# EAGLE board shield8routedhigh (EAGLE 8.7.1)
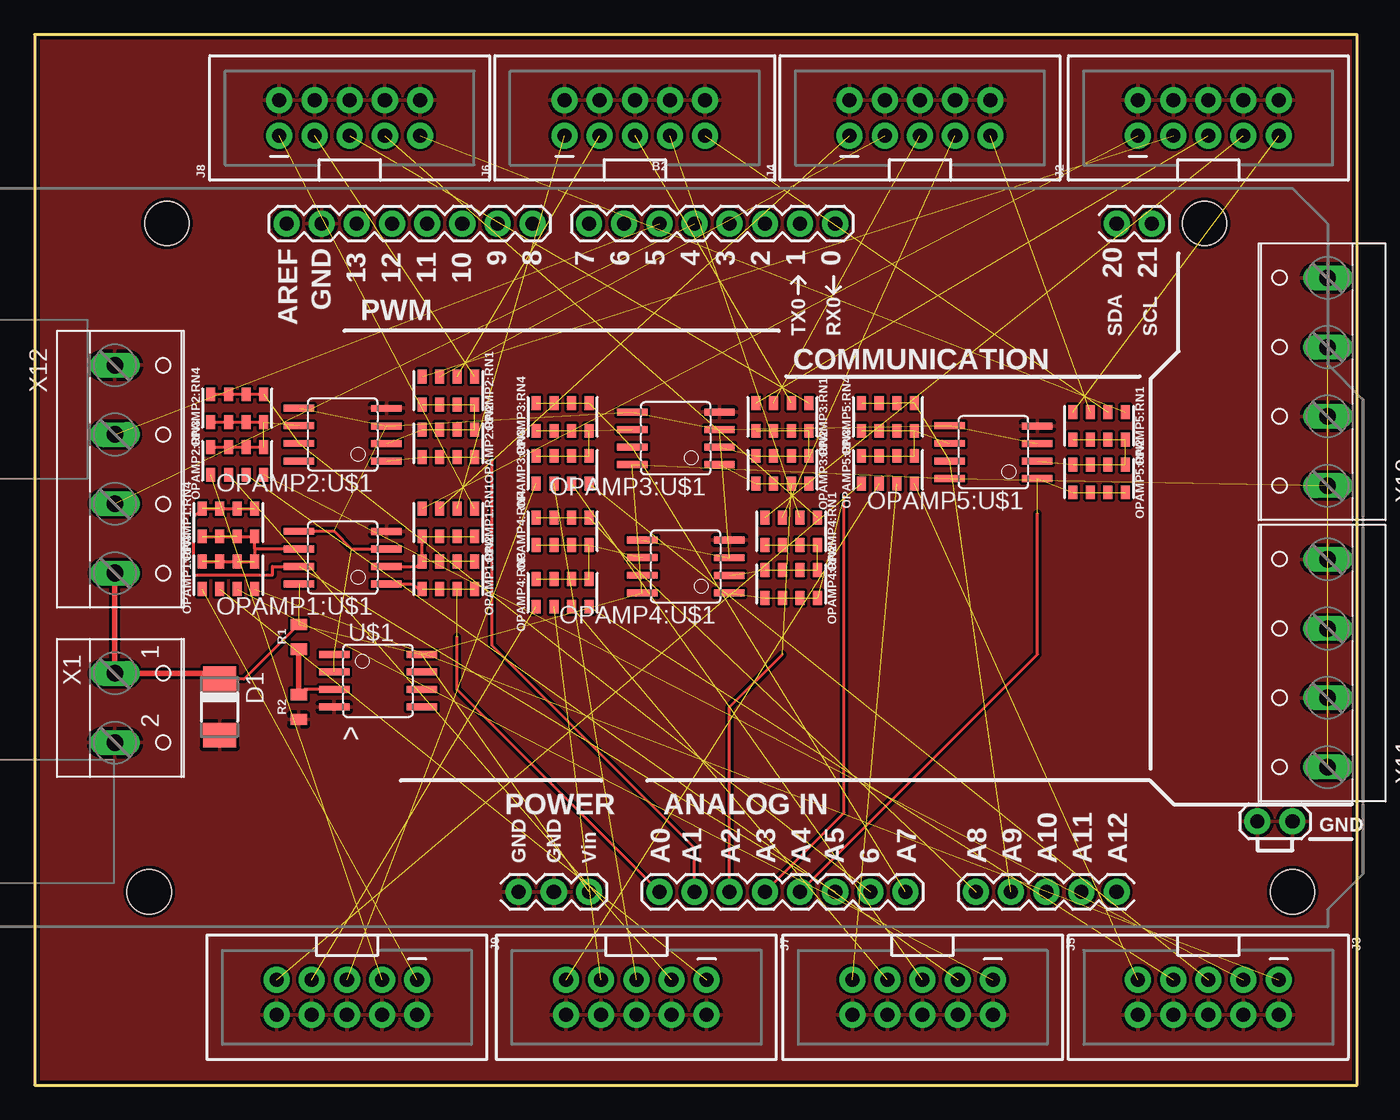
[diagram p0: board, top side]
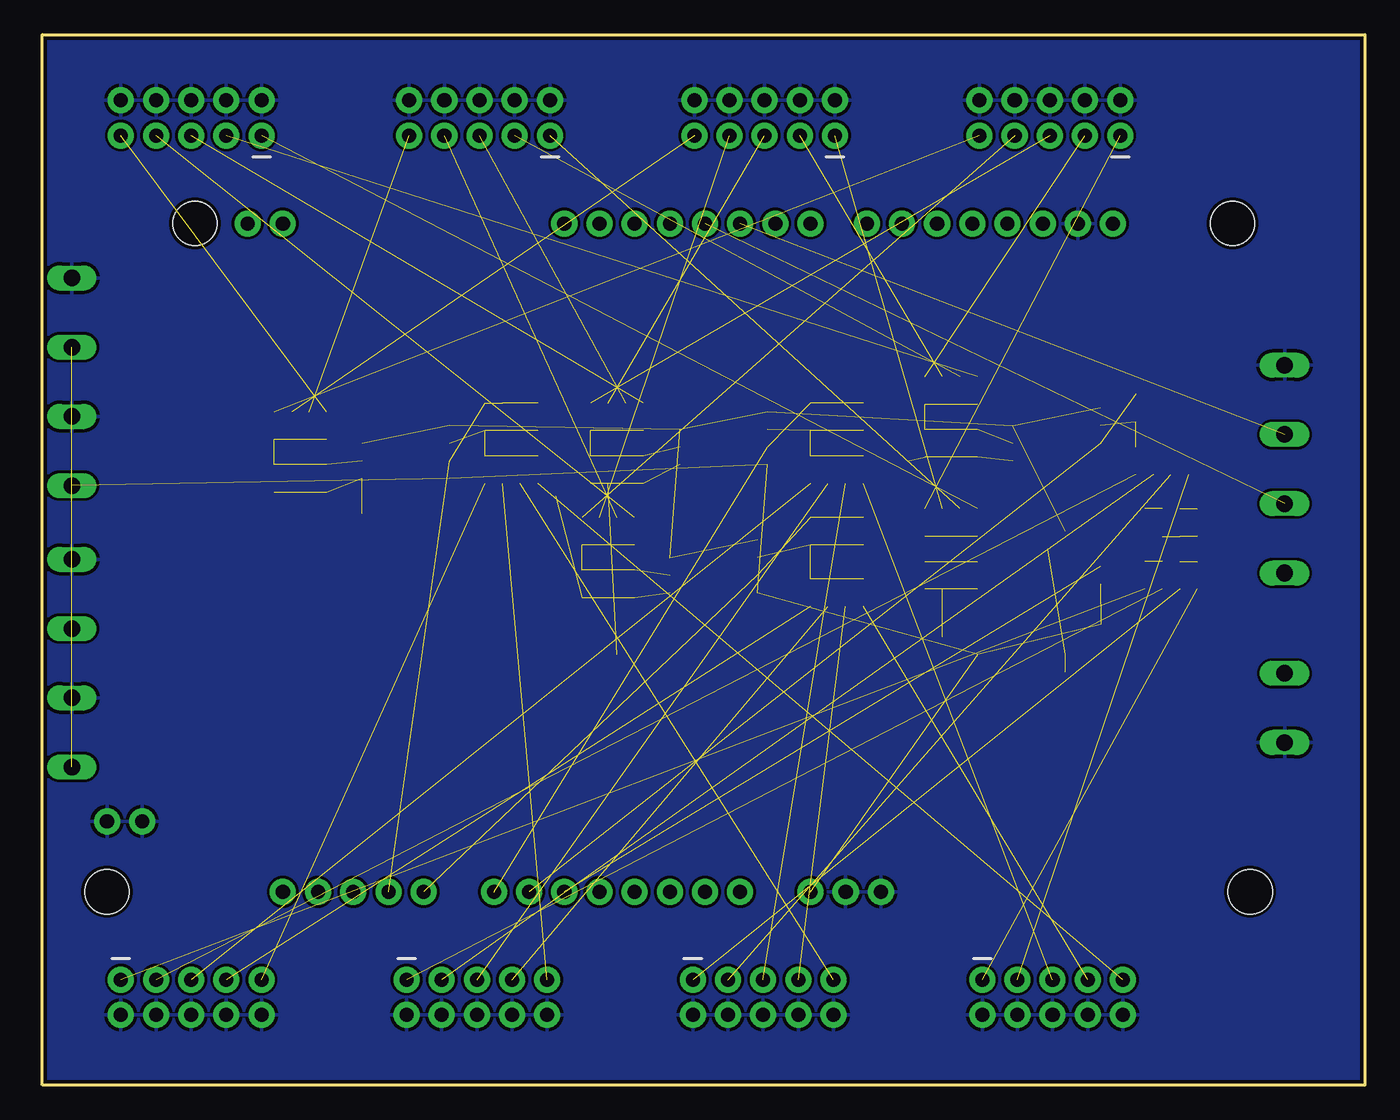
[diagram p1: board, bottom side, seen from below]

Size 95.5 x 75.87 mm. Coordinates in mm from the lower left corner, seen from the top.
Outline: 0,0 95.5,0 95.5,75.87 0,75.87 0,0
Copper layers (1*16): Top 0.035mm / dielectric 1.5mm / Bottom 0.035mm
Design rules "Dirty8TS *": minimum track width 5mil, minimum drill 12mil, track to track 8mil, track to pad 8mil, pad to pad 8mil, via to via 8mil, smd to smd 0mil, copper to edge 10mil, drill to drill 10mil, minimum pad ring 10mil, minimum via ring 6mil, stop-mask expansion 2mil, vias tented up to drill 25mil, thermal gap 10mil
Net classes: 0 default: width 0.203 mm, drill 0.381 mm, clearance 0.203 mm

## Footprints (pad centres in the part's own frame; a part is rotated, then mirrored left to right if it is on the bottom)
ARDUINO_MEGA_EDIT = drill 1.016 pad 1.88: 0 13.97,24.13; 1 11.43,24.13; 2 8.89,24.13; 3 6.35,24.13; 4 3.81,24.13; 5 1.27,24.13; 6 -1.27,24.13; 7 -3.81,24.13; 8 -7.874,24.13; 9 -10.414,24.13; 10 -12.954,24.13; 11 -15.494,24.13; 12 -18.034,24.13; 13 -20.574,24.13; 20 34.29,24.13; 21 36.83,24.13; A0 1.27,-24.13; A1 3.81,-24.13; A2 6.35,-24.13; A3 8.89,-24.13; A4 11.43,-24.13; A5 13.97,-24.13; A6 16.51,-24.13; A7 19.05,-24.13; A8 24.13,-24.13; A9 26.67,-24.13; A10 29.21,-24.13; A11 31.75,-24.13; A12 34.29,-24.13; AREF -25.654,24.13; GND@0 -8.89,-24.13; GND@1 -6.35,-24.13; GND@2 44.45,-19.05; GND@3 46.99,-19.05; GND@4 -23.114,24.13; VIN -3.81,-24.13 | hole 3.2: -34.29,24.13; -35.56,-24.13; 40.64,24.13; 46.99,-24.13
DO-214AC = smd 1.8 x 2.4: A 2.025,0; C -2.025,0
2X5-SHROUDED = drill 1.016 pad 1.88: 1 -1.27,5.08; 2 1.27,5.08; 3 -1.27,2.54; 4 1.27,2.54; 5 -1.27,0; 6 1.27,0; 7 -1.27,-2.54; 8 1.27,-2.54; 9 -1.27,-5.08; 10 1.27,-5.08
0805-ARV_EDIT10K = smd 0.65 x 1: 1 -1.905,-1; 2 -0.635,-1; 3 0.635,-1; 4 1.905,-1; 5 1.905,1; 6 0.635,1; 7 -0.635,1; 8 -1.905,1
SOIC8 = smd 0.5 x 2.2: 1 -1.905,-3.154; 2 -0.645,-3.154; 3 0.625,-3.154; 4 1.895,-3.154; 5 1.905,3.154; 6 0.635,3.154; 7 -0.635,3.154; 8 -1.905,3.154
0805 = smd 0.8 x 1.2: 1 -0.9,0; 2 0.9,0
W237-102 = drill 1.194 long: 1 -2.5,-1.27; 2 2.5,-1.27
W237-4 = drill 1.194 long: 1 -7.5,-1.27; 2 -2.5,-1.27; 3 2.5,-1.27; 4 7.5,-1.27

## Placement (x,y rotation side)
B2  ARDUINO_MEGA_R3_EDIT  [ARDUINO_MEGA_EDIT]  43.84,38.1 0 top
D1  [DO-214AC]  13.36,27.3 270 top
J2  AVR_SPI_PROG_5X2_NEWPTH2  [2X5-SHROUDED]  84.75,69.85 90 top
J3  AVR_SPI_PROG_5X2_NEWPTH2  [2X5-SHROUDED]  84.75,6.35 270 top
J4  AVR_SPI_PROG_5X2_NEWPTH2  [2X5-SHROUDED]  63.93,69.85 90 top
J5  AVR_SPI_PROG_5X2_NEWPTH2  [2X5-SHROUDED]  64.12,6.35 270 top
J6  AVR_SPI_PROG_5X2_NEWPTH2  [2X5-SHROUDED]  43.34,69.85 90 top
J7  AVR_SPI_PROG_5X2_NEWPTH2  [2X5-SHROUDED]  43.45,6.35 270 top
J8  AVR_SPI_PROG_5X2_NEWPTH2  [2X5-SHROUDED]  22.75,69.85 90 top
J9  AVR_SPI_PROG_5X2_NEWPTH2  [2X5-SHROUDED]  22.55,6.35 270 top
OPAMP1:RN1  10k  [0805-ARV_EDIT10K]  29.87,40.64 180 top
OPAMP1:RN2  10k  [0805-ARV_EDIT10K]  29.87,36.83 180 top
OPAMP1:RN3  10k  [0805-ARV_EDIT10K]  14,36.83 0 top
OPAMP1:RN4  10k  [0805-ARV_EDIT10K]  14,40.64 0 top
OPAMP1:U$1  MCP6002SMT  [SOIC8]  22.25,38.1 90 top
OPAMP2:RN1  10k  [0805-ARV_EDIT10K]  29.87,50.16 180 top
OPAMP2:RN2  10k  [0805-ARV_EDIT10K]  29.87,46.35 180 top
OPAMP2:RN3  10k  [0805-ARV_EDIT10K]  14.63,45.09 0 top
OPAMP2:RN4  10k  [0805-ARV_EDIT10K]  14.63,48.9 0 top
OPAMP2:U$1  MCP6002SMT  [SOIC8]  22.25,46.99 90 top
OPAMP3:RN1  10k  [0805-ARV_EDIT10K]  54,48.26 180 top
OPAMP3:RN2  10k  [0805-ARV_EDIT10K]  54,44.45 180 top
OPAMP3:RN3  10k  [0805-ARV_EDIT10K]  38.12,44.45 0 top
OPAMP3:RN4  10k  [0805-ARV_EDIT10K]  38.12,48.26 0 top
OPAMP3:U$1  MCP6002SMT  [SOIC8]  46.3,46.72 90 top
OPAMP4:RN1  10k  [0805-ARV_EDIT10K]  54.64,40.01 180 top
OPAMP4:RN2  10k  [0805-ARV_EDIT10K]  54.64,36.2 180 top
OPAMP4:RN3  10k  [0805-ARV_EDIT10K]  38.12,35.56 0 top
OPAMP4:RN4  10k  [0805-ARV_EDIT10K]  38.12,40.01 0 top
OPAMP4:U$1  MCP6002SMT  [SOIC8]  47.02,37.47 90 top
OPAMP5:RN1  10k  [0805-ARV_EDIT10K]  76.86,47.62 180 top
OPAMP5:RN2  10k  [0805-ARV_EDIT10K]  76.86,43.81 180 top
OPAMP5:RN3  10k  [0805-ARV_EDIT10K]  61.62,44.45 0 top
OPAMP5:RN4  10k  [0805-ARV_EDIT10K]  61.62,48.26 0 top
OPAMP5:U$1  MCP6002SMT  [SOIC8]  69.24,45.72 90 top
R1  1k  [0805]  19.07,32.38 90 top
R2  1k  [0805]  19.07,27.3 90 top
U$1  MCP6002SMT  [SOIC8]  24.79,29.21 270 top
X1  [W237-102]  7.07,27.25 270 top
X10  [W237-4]  92.1,50.8 90 top
X11  [W237-4]  92.1,30.48 90 top
X12  [W237-4]  7.07,44.49 270 top

## Library data of the parts
B2 = SparkFun-Boards
D1 = diode
J2-J9 = SparkFun-Connectors; PROD_ID: CONN-08671; SF_ID: PRT-08506
OPAMP1:RN1-OPAMP1:RN4 OPAMP2:RN1-OPAMP2:RN4 OPAMP3:RN1-OPAMP3:RN4 OPAMP4:RN1-OPAMP4:RN4 OPAMP5:RN1-OPAMP5:RN4 R1 R2 = SparkFun-Resistors
OPAMP1:U$1 OPAMP2:U$1 OPAMP3:U$1 OPAMP4:U$1 OPAMP5:U$1 U$1 = adam - ics
X1 = con-wago-500; MPN: 237-102; OC_FARNELL: unknown; OC_NEWARK: 70K9898
X10-X12 = con-wago-500; OC_FARNELL: unknown; OC_NEWARK: unknown

## Nets
+5V: B2.VIN D1.C OPAMP1:U$1.8 OPAMP3:U$1.8 OPAMP4:U$1.8 OPAMP5:U$1.8 R1.2 U$1.8 X1.1 X10.1 X10.3 X11.1 X11.3 X12.4
A1O: B2.A0 OPAMP1:RN2.5 OPAMP1:RN2.6 OPAMP1:RN2.7 OPAMP1:RN2.8 OPAMP1:U$1.1
A2O: B2.A1 OPAMP2:RN2.5 OPAMP2:RN2.6 OPAMP2:RN2.7 OPAMP2:RN2.8 OPAMP2:U$1.1
A3O: B2.A2 OPAMP3:RN2.5 OPAMP3:RN2.6 OPAMP3:RN2.7 OPAMP3:RN2.8 OPAMP3:U$1.1
A4O: B2.A3 OPAMP4:RN2.5 OPAMP4:RN2.6 OPAMP4:RN2.7 OPAMP4:RN2.8 OPAMP4:U$1.1
A5O: B2.A4 OPAMP5:RN2.5 OPAMP5:RN2.6 OPAMP5:RN2.7 OPAMP5:RN2.8 OPAMP5:U$1.1
A6O: B2.A5 OPAMP1:RN4.5 OPAMP1:RN4.6 OPAMP1:RN4.7 OPAMP1:RN4.8 OPAMP1:U$1.7
A7O: B2.A6 OPAMP2:RN4.5 OPAMP2:RN4.6 OPAMP2:RN4.7 OPAMP2:RN4.8 OPAMP2:U$1.7
A8O: B2.A7 OPAMP3:RN4.5 OPAMP3:RN4.6 OPAMP3:RN4.7 OPAMP3:RN4.8 OPAMP3:U$1.7
A9O: B2.A8 OPAMP4:RN4.5 OPAMP4:RN4.6 OPAMP4:RN4.7 OPAMP4:RN4.8 OPAMP4:U$1.7
A10O: B2.A9 OPAMP5:RN4.5 OPAMP5:RN4.6 OPAMP5:RN4.7 OPAMP5:RN4.8 OPAMP5:U$1.7
CI: B2.4 X12.3
DI: B2.5 X12.2
GND: B2.GND@0 B2.GND@1 B2.GND@2 B2.GND@3 B2.GND@4 D1.A J2.2 J2.4 J2.6 J2.8 J2.10 J3.2 J3.4 J3.6 J3.8 J3.10 J4.2 J4.4 J4.6 J4.8 J4.10 J5.2 J5.4 J5.6 J5.8 J5.10 J6.2 J6.4 J6.6 J6.8 J6.10 J7.2 J7.4 J7.6 J7.8 J7.10 J8.2 J8.4 J8.6 J8.8 J8.10 J9.2 J9.4 J9.6 J9.8 J9.10 OPAMP1:U$1.4 OPAMP2:U$1.4 OPAMP3:U$1.4 OPAMP4:U$1.4 OPAMP5:U$1.4 R2.1 U$1.4 X1.2 X10.2 X10.4 X11.2 X11.4 X12.1
N$2: R1.1 R2.2 U$1.3
OPAMP1:N$1: OPAMP1:RN3.5 OPAMP1:RN3.6 OPAMP1:RN3.7 OPAMP1:RN3.8 OPAMP1:RN4.1 OPAMP1:RN4.2 OPAMP1:RN4.3 OPAMP1:RN4.4 OPAMP1:U$1.6
OPAMP1:N$2: OPAMP1:RN1.5 OPAMP1:RN1.6 OPAMP1:RN1.7 OPAMP1:RN1.8 OPAMP1:RN2.1 OPAMP1:RN2.2 OPAMP1:RN2.3 OPAMP1:RN2.4 OPAMP1:U$1.2
OPAMP2:N$1: OPAMP2:RN3.5 OPAMP2:RN3.6 OPAMP2:RN3.7 OPAMP2:RN3.8 OPAMP2:RN4.1 OPAMP2:RN4.2 OPAMP2:RN4.3 OPAMP2:RN4.4 OPAMP2:U$1.6
OPAMP2:N$2: OPAMP2:RN1.5 OPAMP2:RN1.6 OPAMP2:RN1.7 OPAMP2:RN1.8 OPAMP2:RN2.1 OPAMP2:RN2.2 OPAMP2:RN2.3 OPAMP2:RN2.4 OPAMP2:U$1.2
OPAMP3:N$1: OPAMP3:RN3.5 OPAMP3:RN3.6 OPAMP3:RN3.7 OPAMP3:RN3.8 OPAMP3:RN4.1 OPAMP3:RN4.2 OPAMP3:RN4.3 OPAMP3:RN4.4 OPAMP3:U$1.6
OPAMP3:N$2: OPAMP3:RN1.5 OPAMP3:RN1.6 OPAMP3:RN1.7 OPAMP3:RN1.8 OPAMP3:RN2.1 OPAMP3:RN2.2 OPAMP3:RN2.3 OPAMP3:RN2.4 OPAMP3:U$1.2
OPAMP4:N$1: OPAMP4:RN3.5 OPAMP4:RN3.6 OPAMP4:RN3.7 OPAMP4:RN3.8 OPAMP4:RN4.1 OPAMP4:RN4.2 OPAMP4:RN4.3 OPAMP4:RN4.4 OPAMP4:U$1.6
OPAMP4:N$2: OPAMP4:RN1.5 OPAMP4:RN1.6 OPAMP4:RN1.7 OPAMP4:RN1.8 OPAMP4:RN2.1 OPAMP4:RN2.2 OPAMP4:RN2.3 OPAMP4:RN2.4 OPAMP4:U$1.2
OPAMP5:N$1: OPAMP5:RN3.5 OPAMP5:RN3.6 OPAMP5:RN3.7 OPAMP5:RN3.8 OPAMP5:RN4.1 OPAMP5:RN4.2 OPAMP5:RN4.3 OPAMP5:RN4.4 OPAMP5:U$1.6
OPAMP5:N$2: OPAMP5:RN1.5 OPAMP5:RN1.6 OPAMP5:RN1.7 OPAMP5:RN1.8 OPAMP5:RN2.1 OPAMP5:RN2.2 OPAMP5:RN2.3 OPAMP5:RN2.4 OPAMP5:U$1.2
S1A: J2.1 OPAMP1:RN1.4
S1B: J3.1 OPAMP1:RN3.4
S2A: J2.3 OPAMP2:RN1.4
S2B: J3.3 OPAMP2:RN3.4
S3A: J2.5 OPAMP3:RN1.4
S3B: J3.5 OPAMP3:RN3.4
S4A: J2.7 OPAMP4:RN1.4
S4B: J3.7 OPAMP4:RN3.4
S5A: J2.9 OPAMP5:RN1.4
S5B: J3.9 OPAMP5:RN3.4
S6A: J4.1 OPAMP1:RN1.3
S6B: J5.1 OPAMP1:RN3.3
S7A: J4.3 OPAMP2:RN1.3
S7B: J5.3 OPAMP2:RN3.3
S8A: J4.5 OPAMP3:RN1.3
S8B: J5.5 OPAMP3:RN3.3
S9A: J4.7 OPAMP4:RN1.3
S9B: J5.7 OPAMP4:RN3.3
S10A: J4.9 OPAMP5:RN1.3
S10B: J5.9 OPAMP5:RN3.3
S11A: J6.1 OPAMP1:RN1.2
S11B: J7.1 OPAMP1:RN3.2
S12A: J6.3 OPAMP2:RN1.2
S12B: J7.3 OPAMP2:RN3.2
S13A: J6.5 OPAMP3:RN1.2
S13B: J7.5 OPAMP3:RN3.2
S14A: J6.7 OPAMP4:RN1.2
S14B: J7.7 OPAMP4:RN3.2
S15A: J6.9 OPAMP5:RN1.2
S15B: J7.9 OPAMP5:RN3.2
S16A: J8.1 OPAMP1:RN1.1
S16B: J9.1 OPAMP1:RN3.1
S17A: J8.3 OPAMP2:RN1.1
S17B: J9.3 OPAMP2:RN3.1
S18A: J8.5 OPAMP3:RN1.1
S18B: J9.5 OPAMP3:RN3.1
S19A: J8.7 OPAMP4:RN1.1
S19B: J9.7 OPAMP4:RN3.1
S20A: J8.9 OPAMP5:RN1.1
S20B: J9.9 OPAMP5:RN3.1
VCC: OPAMP2:U$1.8
VREF: OPAMP1:U$1.3 OPAMP1:U$1.5 OPAMP2:U$1.3 OPAMP2:U$1.5 OPAMP3:U$1.3 OPAMP3:U$1.5 OPAMP4:U$1.3 OPAMP4:U$1.5 OPAMP5:U$1.3 OPAMP5:U$1.5 U$1.1 U$1.2

## Tracks (layer width: path | path; a pad name or v marks a point on that pad's centre or on a via)
+5V  (10 unrouted)
  Top 0.203: R1.2 15.12,29.33 D1.C
  Top 0.406: D1.C 12.94,29.75 X1.1 X12.4
A1O  (4 unrouted)
  Top 0.203: OPAMP1:U$1.1 27.33,36.2 27.7,35.83 OPAMP1:RN2.5 | B2.A0 30.51,28.57 30.51,32.38
A2O  (5 unrouted)
  Top 0.203: B2.A1 47.65,17.14 33.05,31.75 33.05,45.09
A3O  (5 unrouted)
  Top 0.203: B2.A2 50.19,27.3 54,31.11
A4O  (5 unrouted)
  Top 0.203: B2.A3 58.44,19.68 58.44,42.55
A5O  (5 unrouted)
  Top 0.203: B2.A4 72.42,31.11 72.42,41.27
A6O  (3 unrouted)
  Top 0.203: OPAMP1:U$1.7 17.17,37.47 17.17,36.83 11.45,36.83 11.45,41.01 OPAMP1:RN4.8 OPAMP1:RN4.5
A7O  (2 unrouted)
  Top 0.203: OPAMP2:RN4.8 OPAMP2:RN4.7 OPAMP2:RN4.6 OPAMP2:RN4.5
A8O  (5 unrouted)
A9O  (5 unrouted)
A10O  (5 unrouted)
CI  (1 unrouted)
DI  (1 unrouted)
GND
  pour Bottom: 0,76 95.5,76 95.5,0 0,0
  pour Top: 0,76 95.5,76 95.5,0 0,0
N$2
  Top 0.203: U$1.3 21.63,28.57 19.45,28.57 R2.2
  Top 0.406: R2.2 R1.1
OPAMP1:N$1  (4 unrouted)
  Top 0.203: OPAMP1:U$1.6 15.9,38.73 | 15.9,38.73 OPAMP1:RN4.4 OPAMP1:RN4.1 | 15.9,38.73 OPAMP1:RN3.5 OPAMP1:RN3.8
OPAMP1:N$2  (6 unrouted)
  Top 0.203: OPAMP1:U$1.2 27.59,37.45 OPAMP1:RN2.4 OPAMP1:RN1.5
OPAMP2:N$1  (2 unrouted)
  Top 0.203: OPAMP2:RN4.1 OPAMP2:RN4.2 OPAMP2:RN4.3 OPAMP2:RN4.4 | OPAMP2:RN3.8 OPAMP2:RN3.7 OPAMP2:RN3.6 OPAMP2:RN3.5
OPAMP2:N$2  (8 unrouted)
OPAMP3:N$1  (8 unrouted)
OPAMP3:N$2  (8 unrouted)
OPAMP4:N$1  (8 unrouted)
OPAMP4:N$2  (8 unrouted)
OPAMP5:N$1  (8 unrouted)
OPAMP5:N$2  (8 unrouted)
S1A  (1 unrouted)
S1B  (1 unrouted)
S2A  (1 unrouted)
S2B  (1 unrouted)
S3A  (1 unrouted)
S3B  (1 unrouted)
S4A  (1 unrouted)
S4B  (1 unrouted)
S5A  (1 unrouted)
S5B  (1 unrouted)
S6A  (1 unrouted)
S6B  (1 unrouted)
S7A  (1 unrouted)
S7B  (1 unrouted)
S8A  (1 unrouted)
S8B  (1 unrouted)
S9A  (1 unrouted)
S9B  (1 unrouted)
S10A  (1 unrouted)
S10B  (1 unrouted)
S11A  (1 unrouted)
S11B  (1 unrouted)
S12A  (1 unrouted)
S12B  (1 unrouted)
S13A  (1 unrouted)
S13B  (1 unrouted)
S14A  (1 unrouted)
S14B  (1 unrouted)
S15A  (1 unrouted)
S15B  (1 unrouted)
S16A  (1 unrouted)
S16B  (1 unrouted)
S17A  (1 unrouted)
S17B  (1 unrouted)
S18A  (1 unrouted)
S18B  (1 unrouted)
S19A  (1 unrouted)
S19B  (1 unrouted)
S20A  (1 unrouted)
S20B  (1 unrouted)
VREF  (10 unrouted)
  Top 0.203: OPAMP1:U$1.5 21.61,40.01 22.88,38.73 OPAMP1:U$1.3

## Text on the board
tPlace: ^